# EAGLE board 6274Amp_V2 (EAGLE 7.2.0)
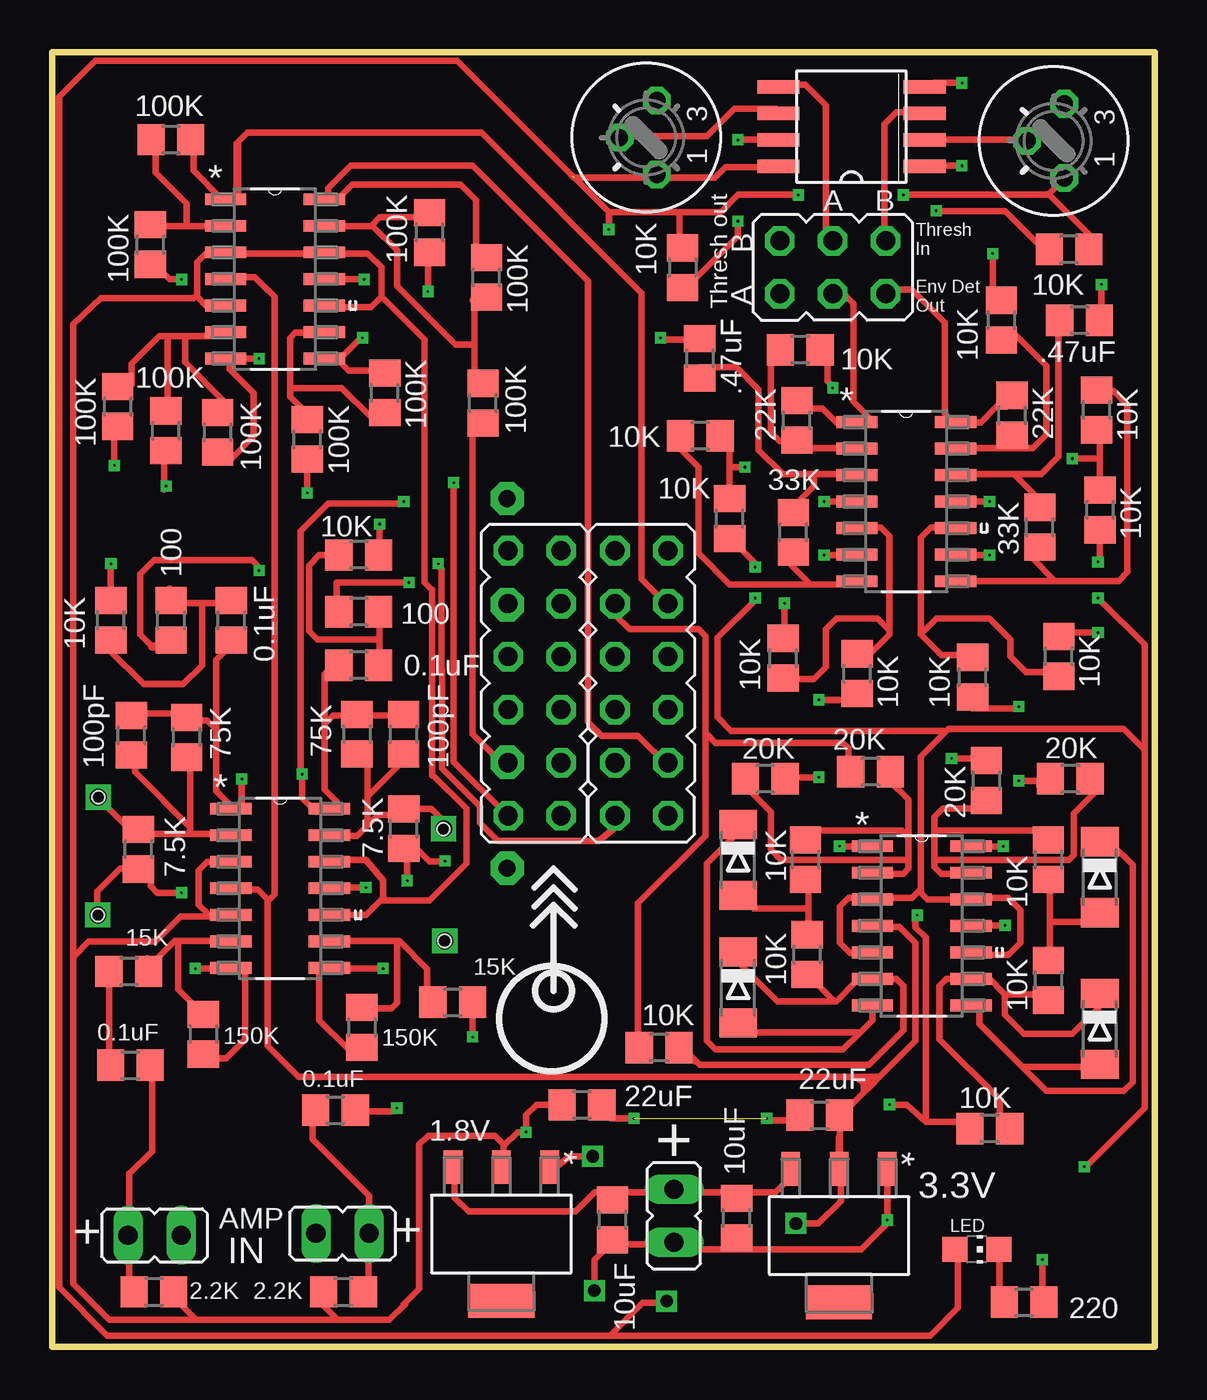
[diagram p0: board, top side]
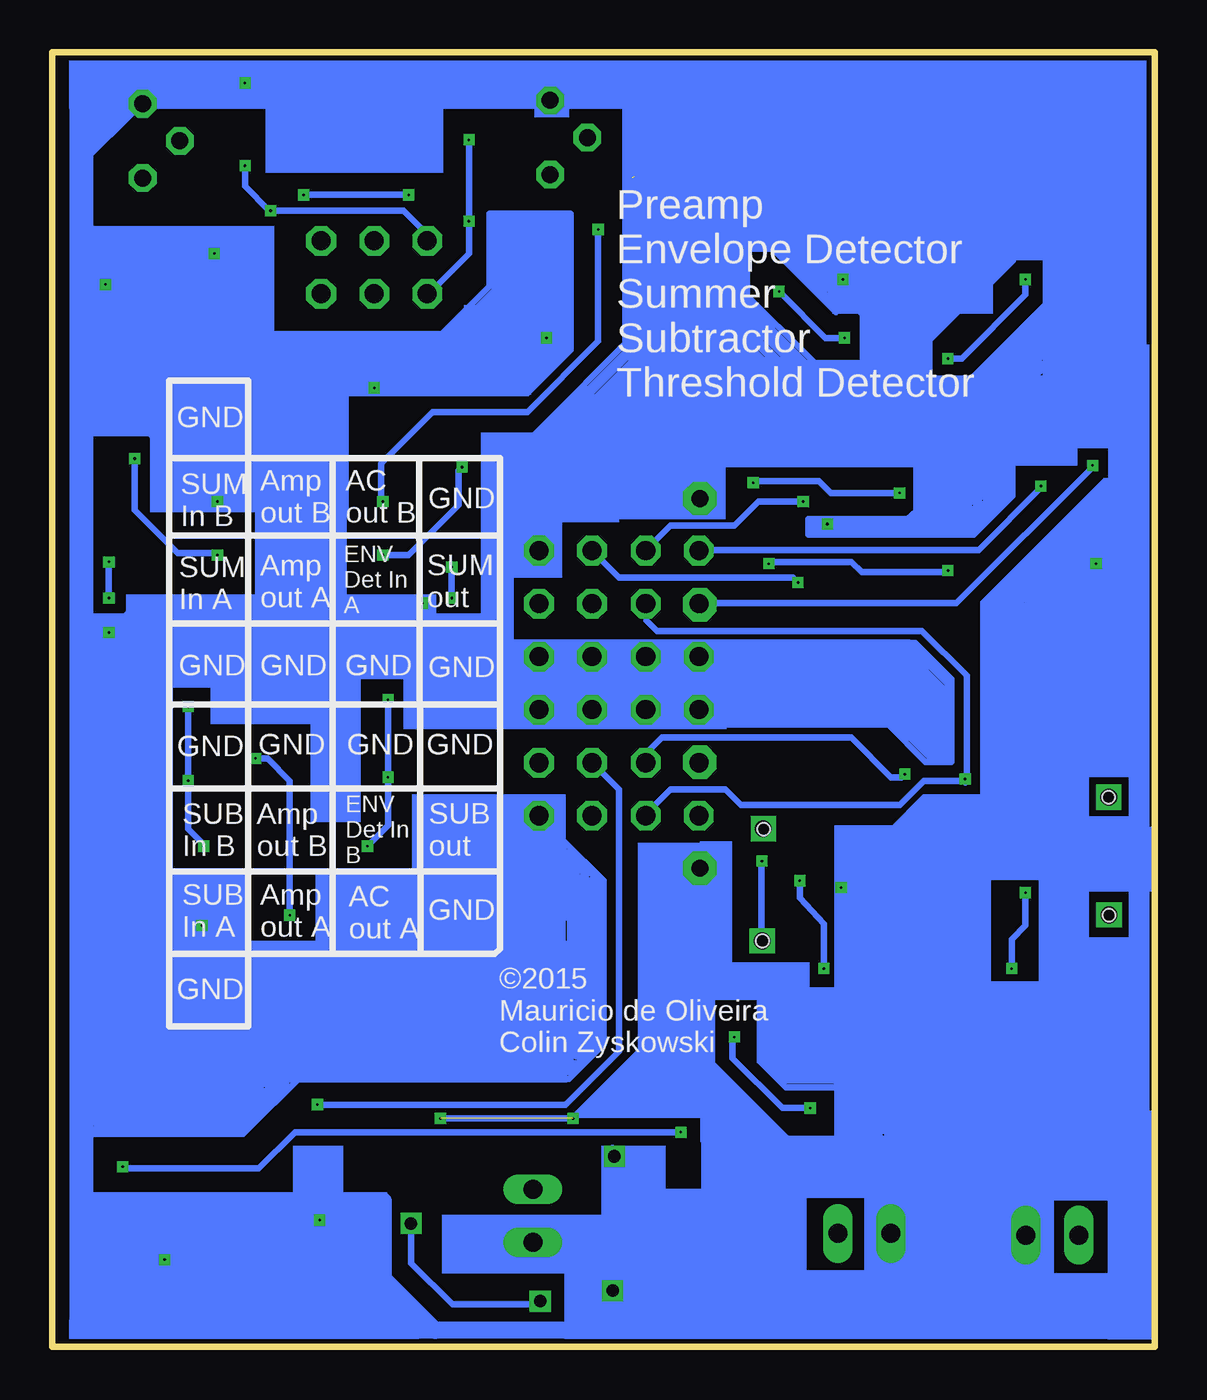
[diagram p1: board, bottom side, seen from below]

Size 52.83 x 62.01 mm. Coordinates in mm from the lower left corner, seen from the top.
Outline: 0,0 0,62.01 52.83,62.01 52.83,0 0,0
Copper layers (1*16): Top 0.035mm / dielectric 1.5mm / Bottom 0.035mm
Design rules "default": minimum track width 10mil, minimum drill 24mil, track to track 8mil, track to pad 8mil, pad to pad 8mil, via to via 8mil, smd to smd 8mil, copper to edge 40mil, drill to drill 8mil, minimum pad ring 10mil, minimum via ring 8mil, stop-mask expansion 4mil, vias tented up to drill 0mil, thermal gap 10mil
Holes 0.6 mm at 2.19,20.66 2.21,26.31 18.75,24.79 18.8,19.43

## Footprints (pad centres in the part's own frame; a part is rotated, then mirrored left to right if it is on the bottom)
R0805 = smd 1.3 x 1.5: 1 -0.95,0; 2 0.95,0
05 = drill 0.813 pad 1.6 octagon: 1 -2.54,0; 2 2.54,0
SO08-208 = smd 0.66 x 2.032: 1 -1.905,-3.498; 2 -0.635,-3.498; 3 0.635,-3.498; 4 1.905,-3.498; 5 1.905,3.498; 6 0.635,3.498; 7 -0.635,3.498; 8 -1.905,3.498
JP6Q = drill 0.914 octagon: 1 -6.35,-1.27; 2 -6.35,1.27; 3 -3.81,-1.27; 4 -3.81,1.27; 5 -1.27,-1.27; 6 -1.27,1.27; 7 1.27,-1.27; 8 1.27,1.27; 9 3.81,-1.27; 10 3.81,1.27; 11 6.35,-1.27; 12 6.35,1.27
RJ6 = drill 0.813 octagon: A -1.778,-0.508; E 1.778,-0.508; S 0,1.27
JP1 = drill 0.914 long: 1 0,-1.27; 2 0,1.27
JP3Q = drill 0.914 octagon: 1 -2.54,-1.27; 2 -2.54,1.27; 3 0,-1.27; 4 0,1.27; 5 2.54,-1.27; 6 2.54,1.27
MINIMELF = smd 1.4 x 1.8: A 1.7,0; C -1.7,0
SOT230P700X180-4N = smd 1.626 x 0.889: 1 -3.2,2.311; 2 -3.2,0; 3 -3.2,-2.311 | smd 1.626 x 3.175: 4 3.2,0
CHIP-LED0805 = smd 1.2 x 1.2: A 0,-1.05; C 0,1.05
SOIC127P600X175-14N = smd 1.981 x 0.559: 1 -2.362,3.81; 2 -2.362,2.54; 3 -2.362,1.27; 4 -2.362,0; 5 -2.362,-1.27; 6 -2.362,-2.54; 7 -2.362,-3.81; 8 2.362,-3.81; 9 2.362,-2.54; 10 2.362,-1.27; 11 2.362,0; 12 2.362,1.27; 13 2.362,2.54; 14 2.362,3.81

## Placement (x,y rotation side)
E$1  [R0805]  26.85,6.07 90 top
E$2  [R0805]  36.77,11.09 0 top
E$3  [R0805]  25.38,11.58 0 top
E$4  [R0805]  30.2,51.69 270 top
E$5  [05]  21.8,38.09 90 top
E$6  [05]  21.8,25.46 90 top
E$7  [R0805]  48.72,52.56 180 top
E$82  [SO08-208]  38.3,58.45 90 top
E$83  [JP6Q]  23.12,31.78 90 top
E$84  [JP6Q]  28.24,31.78 90 top
E$85  [RJ6]  47.99,57.77 90 top
E$86  [JP1]  29.8,6.25 180 top
E$87  [RJ6]  28.46,57.92 90 top
E$88  [JP3Q]  37.4,51.71 0 top
E$89  [R0805]  50.04,44.87 90 top
E$90  [R0805]  50.21,40.08 90 top
E$91  [R0805]  47.32,39.26 90 top
E$92  [R0805]  46,44.62 90 top
E$93  [R0805]  49.22,49.16 180 top
E$94  [R0805]  45.48,49.17 90 top
E$95  [R0805]  48.23,33.06 90 top
E$96  [R0805]  44.1,32.07 90 top
E$97  [R0805]  35.68,44.37 90 top
E$98  [JP1]  4.9,5.33 90 top
E$99  [JP1]  13.91,5.42 90 top
E$100  [R0805]  3.75,13.48 0 top
E$101  [R0805]  3.67,17.98 0 top
E$102  [R0805]  7.25,14.96 270 top
E$103  [R0805]  4.13,23.82 90 top
E$104  [R0805]  3.8,29.28 90 top
E$105  [R0805]  6.45,29.18 90 top
E$106  [R0805]  2.81,34.8 90 top
E$107  [MINIMELF]  50.2,22.49 270 top
E$108  [MINIMELF]  50.2,15.22 270 top
E$109  [R0805]  47.73,23.32 90 top
E$110  [R0805]  47.73,17.55 90 top
E$111  [R0805]  44.93,10.45 180 top
E$112  [R0805]  29.08,14.33 180 top
E$113  [R0805]  12.22,43.47 90 top
E$114  [R0805]  15.94,45.69 90 top
E$115  [R0805]  20.64,45.2 90 top
E$116  [R0805]  20.81,51.23 90 top
E$117  [R0805]  18.08,53.37 90 top
E$118  [R0805]  13.96,2.62 0 top
E$120  [R0805]  4.88,2.62 0 top
E$122  [R0805]  31.06,43.63 180 top
E$123  [R0805]  3.14,45.03 90 top
E$124  [R0805]  5.45,43.88 90 top
E$125  [R0805]  7.93,43.8 90 top
E$126  [R0805]  4.71,52.79 90 top
E$127  [R0805]  5.69,57.82 180 top
E$128  [R0805]  35.85,47.76 180 top
E$129  [SOT230P700X180-4N]  37.7,5.31 270 top
E$130  [SOT230P700X180-4N]  21.52,5.4 270 top
E$131  [R0805]  31.03,47.35 270 top
E$132  [R0805]  35.52,39.01 90 top
E$133  [R0805]  32.46,39.67 90 top
E$134  [MINIMELF]  32.86,17.2 270 top
E$135  [R0805]  36.18,18.78 90 top
E$136  [MINIMELF]  32.86,23.31 270 top
E$137  [R0805]  36.09,23.32 90 top
E$138  [R0805]  32.79,6.15 90 top
E$139  [R0805]  5.7,34.8 90 top
E$140  [R0805]  8.59,34.8 90 top
E$141  [R0805]  14.69,35.2 180 top
E$142  [R0805]  14.69,32.64 180 top
E$143  [R0805]  14.6,29.34 270 top
E$144  [R0805]  16.83,29.34 270 top
E$145  [R0805]  16.85,24.81 90 top
E$146  [R0805]  13.58,11.33 0 top
E$147  [R0805]  14.84,15.29 270 top
E$148  [R0805]  19.19,16.49 0 top
E$149  [R0805]  14.69,37.92 180 top
E$150  [R0805]  38.57,32.24 90 top
E$151  [R0805]  35.02,32.98 90 top
E$152  [R0805]  44.76,27.12 90 top
E$153  [R0805]  48.78,27.2 180 top
E$154  [R0805]  34.17,27.2 180 top
E$155  [R0805]  39.2,27.53 180 top
E$163  [CHIP-LED0805]  44.3,4.65 270 top
E$164  [R0805]  46.56,2.13 0 top
MCP4  [SOIC127P600X175-14N]  40.92,40.48 0 top
MCP5  [SOIC127P600X175-14N]  41.66,20.15 0 top
MCP6  [SOIC127P600X175-14N]  10.92,21.95 0 top
MCP7  [SOIC127P600X175-14N]  10.67,51.14 0 top

## Library data of the parts
E$1-E$4 E$7 E$89-E$97 E$100-E$106 E$109-E$118 E$120 E$122-E$128 E$131-E$133 E$135 E$137-E$155 E$164 = eagle-ltspice
E$5 E$6 = jumper4
E$82 = maxim
E$83 E$84 E$86 E$88 E$98 E$99 = jumper
E$85 E$87 = pot
E$107 E$108 E$134 E$136 = ref-packages
E$129 E$130 = LD1117s_VoltageRegulator
E$163 = ref-packages-longpad
MCP4-MCP7 = MCP3423

## Nets
S$343: MCP4.4

## Tracks (layer width: path | path; a pad name or v marks a point on that pad's centre or on a via)
S$1
  Bottom 0.305: 28.98,47.42 28.98,47 | 28.98,47 28.98,46.75 30.05,45.68 51.27,45.68 51.35,45.6 | 28.98,47 29.06,47 29.97,46.09 29.97,46.75 29.64,47.09
S$2
  Bottom 0.305: 2.9,39.99 2.9,39.9 5.87,36.93 5.87,36.11 4.38,36.11 4.3,36.19 4.3,38.25 5.78,36.77 5.78,36.35 5.7,36.27 4.46,36.27
S$3
  Bottom 0.305: 50.94,57.4 49.04,59.3 50.86,59.3 50.86,57.82 | 50.86,57.73 50.86,57.82 | 50.86,57.82 49.45,59.22 49.7,59.22 50.77,58.15 50.77,58.48 50.11,59.14 50.36,59.14 50.69,58.81 50.69,59.05 50.61,59.14
S$4
  Bottom 0.305: 51.85,59.39 51.85,1.1
S$5
  Bottom 0.305: 21.72,13.82 21.47,13.82 17.34,9.69 21.47,9.69 21.63,9.86 21.63,13.65 17.75,9.77 18.08,9.77 21.47,13.16 21.47,10.02 18.74,10.02 18.66,10.1 18.74,10.1 21.39,12.74 21.39,12.41 19.16,10.19 19.49,10.19 21.3,12 21.3,11.67 19.74,10.1 20.07,10.1 21.39,11.42 21.39,11.18 20.4,10.19 20.73,10.19 21.3,10.76 21.3,10.43 21.06,10.19 21.3,10.19 21.39,10.27
S$6
  Bottom 0.305: 24.61,14.4 24.61,14.23 27.74,11.09 25.02,11.09 | 25.02,11.09 24.61,11.09 | 24.61,11.09 24.61,13.57 24.77,13.74 27.25,11.26 24.85,11.26 24.85,13.4 26.92,11.34 26.5,11.34 24.94,12.91 24.94,12.58 26.09,11.42 25.76,11.42 25.02,12.17 25.02,11.84 25.43,11.42 25.18,11.42 25.02,11.59 25.02,11.09 | 24.61,11.09 21.14,11.09 20.97,11.26
S$7
  Bottom 0.305: 28.73,12.83 28.07,12.83 26.42,14.48 26.42,14.56 | 26.42,14.56 26.42,22.32 28.32,24.22 28.32,22.32 26.67,22.32 | 26.67,22.32 26.59,22.24 | 26.67,22.32 28.07,23.72 28.07,22.49 27.33,22.49 27.25,22.57 27.91,23.23 27.91,22.82 27.83,22.73 27.66,22.73 | 26.42,14.56 28.16,14.56 28.16,13.16 28.07,13.16 27.66,13.57 | 26.92,14.31 27.08,14.15 27.25,13.98 | 26.92,14.31 27.99,14.31 27.99,13.57 27.66,13.57 | 27.66,13.57 27.25,13.98 | 26.92,14.31 26.83,14.4 27.25,14.4 27.74,13.9 27.74,14.07 27.58,14.23 27.33,13.98 27.25,13.98
S$8  (via drill 0.13)
  Top 0.305: v2.81,37.51 2.81,35.69
  Bottom 0.305: 2.73,40.32 2.81,40.23 v2.81,37.51
S$9
  Bottom 0.305: 6.86,41.14 6.86,40.73 8.67,38.91 16.6,38.91 16.6,39.66 11.81,39.66 11.73,39.74 | 11.32,40.15 11.32,41.06 | 11.32,39.9 11.32,39.16 8.76,39.16 7.19,40.73 7.6,40.73 | 7.85,40.73 11.07,40.73 11.15,40.65 11.15,39.33 9,39.33 7.6,40.73 | 7.6,40.73 7.85,40.73 | 7.85,40.73 9.17,39.41 10.74,39.41 10.9,39.57 10.9,40.48 8.51,40.48 8.43,40.56 8.43,40.4 9.25,39.57 10.66,39.57 10.74,39.66 10.74,40.23 9,40.23 | 9,40.23 8.92,40.32 | 9,40.23 9.33,39.9 10.57,39.9 10.49,39.99 9.66,39.99 9.5,40.15 10.9,40.15 11.65,39.41 11.65,39.24 16.35,39.24 16.43,39.16 16.43,39.41 11.98,39.41 11.89,39.49 11.56,39.16 | 11.73,39.57 11.73,39.74 | 11.73,39.74 11.32,40.15 | 11.32,40.15 11.32,39.9 | 11.32,39.9 11.48,39.9
S$10
  Bottom 0.305: 29.15,46.67 29.06,46.67 27.99,47.75 27.99,54.27 31.87,54.27 31.87,50.8 34.26,48.41 33.85,48.41 31.62,50.63 31.62,50.22 33.69,48.16 33.44,48.16 31.62,49.97
S$11
  Bottom 0.305: 28.73,48.98 28.73,47.33 | 28.73,47.33 28.82,47.25 | 28.73,47.33 28.24,47.83 28.24,48.98 28.57,48.98 28.57,47.83 28.49,47.75 28.49,48.74 28.4,48.82
S$12
  Bottom 0.305: 24.69,49.4 24.69,48.74 29.89,43.54 29.48,43.54 24.69,48.32 24.69,47.99 29.23,43.45 28.82,43.45 24.36,47.91 24.36,47.5 28.57,43.29 28.16,43.29 24.36,47.09 24.36,46.75 27.91,43.21 27.5,43.21 24.52,46.18 24.52,45.85 26.75,43.62 26.42,43.62 24.61,45.43 24.61,45.02 25.93,43.7 25.6,43.7 24.69,44.61 24.69,44.28 25.35,43.62 25.1,43.62 24.77,43.95
S$13
  Bottom 0.305: 15.53,47.09 16.27,47.09 19.9,50.72 19.9,50.3 16.76,47.17 17.18,47.17 19.65,49.64 19.65,49.31 17.59,47.25 18,47.25 19.57,48.82 19.57,48.49 18.33,47.25 18.74,47.25 19.57,48.08 19.57,47.75 19.08,47.25 19.32,47.25 19.41,47.33
S$14  (via drill 0.13)
  Bottom 0.305: v14.87,48.32 15.77,48.32 17.92,50.47
S$15
  Top 0.305: 34.26,10.85 35.59,10.85
S$16
  Bottom 0.305: 34.26,10.93 27.83,10.93 27.58,11.18
S$17
  Top 0.305: 27.83,10.93 26.75,10.93 26.34,11.34
S$18
  Bottom 0.305: 21.63,42.3 23.04,42.3 24.52,40.81 24.94,40.81 | 25.84,40.81 24.94,40.81 | 24.94,40.81 23.29,42.46 23.7,42.46 24.69,41.47 24.69,41.88 24.11,42.46
S$19
  Bottom 0.305: 38.31,1.19 35.59,1.19 35.59,1.1 38.14,1.1
S$20  (via drill 0.13)
  Bottom 0.305: v16.85,40.48 18.99,40.48 20.15,39.33 23.2,39.33 24.44,38.09
S$21
  Bottom 0.305: 18.91,13.82 18.91,13.65 17.67,12.41 15.03,12.41 | 14.95,12.41 15.03,12.41 | 15.03,12.41 15.36,12.74 17.84,12.74 18.66,13.57 15.36,13.57 15.36,12.91 15.44,12.83 17.59,12.83 18.17,13.4 15.53,13.4 15.44,13.32 15.44,13.24 17.75,13.24 17.51,12.99 15.36,12.99 15.11,13.24
S$22
  Bottom 0.305: 12.8,30.08 12.8,29.83 10.99,28.02 9.75,28.02 9.75,31.98 11.48,33.71 12.14,33.71 12.39,33.46 11.65,33.46 9.91,31.73 9.91,28.18 10.74,28.18 12.31,29.75 11.98,29.75 10.66,28.43 10.08,28.43 10.08,31.48 11.81,33.22 11.81,29.91 11.73,29.91 10.49,28.68 10.32,28.68 10.32,31.32 11.65,32.64 11.65,29.91 10.66,28.92 10.66,31.9 11.56,32.8 11.56,30.08 11.07,29.58 | 11.07,29.58 10.49,29.01 10.49,31.32 10.66,31.32 11.4,32.06 11.4,30.16 10.74,29.5 10.74,31.07 10.82,31.15 10.82,31.32 11.15,31.65 11.15,30.25 10.99,30.08 10.99,31.15 10.9,31.24 10.9,29.75 11.07,29.58
S$23
  Bottom 0.305: 5.04,50.14 9.25,45.93 8.84,45.93 5.04,49.73 5.04,49.31 8.18,46.18 7.77,46.18 5.21,48.74 5.21,48.41 7.19,46.42 6.78,46.42 5.29,47.91 5.29,47.58 6.78,46.09 6.45,46.09 5.45,47.09 5.45,46.75 5.87,46.34 5.87,46.42 5.7,46.59
S$24
  Bottom 0.305: 15.28,49.56 18.08,52.37 15.53,52.37 15.53,50.14 | 15.53,49.97 15.53,50.14 | 15.53,50.14 17.59,52.2 15.86,52.2 15.77,52.12 15.77,50.72 | 15.77,50.63 15.77,50.72 | 15.77,50.72 17.09,52.04 16.02,52.04 15.94,51.96 15.94,51.13 16.68,51.87 16.19,51.87 16.19,51.63 | 16.19,51.46 16.19,51.63 | 16.19,51.63 16.35,51.79
S$26
  Bottom 0.305: 40.79,13.07 43.68,10.19 51.02,10.19 | 51.1,10.19 51.02,10.19 | 51.02,10.19 50.77,10.43 43.76,10.43 41.61,12.58 43.43,12.58 43.43,11.09 42.02,12.5 42.35,12.5 43.26,11.59 43.26,12.41 42.85,12.41 42.85,12.33 43.1,12.08 44.58,12.08 44.83,11.84
S$27
  Top 0.305: 7.19,35.53 7.19,32.64 6.28,31.73 4.38,31.73 2.73,33.38
S$28
  Top 0.406: 5.62,35.61 5.62,36.27
S$29
  Top 0.305: 4.79,33.55 4.22,34.12 4.22,37.01 4.88,37.67 7.93,37.67 | 7.02,37.67 7.93,37.67 | 7.93,37.67 9.58,37.67 9.99,37.26
  Top 0.406: 5.62,33.55 4.79,33.55
S$30
  Bottom 0.305: 3.23,39.08 3.06,39.08 2.98,39.16 2.98,39.49 5.12,37.34 5.12,36.77 4.88,37.01 4.88,36.68 5.29,36.68 4.63,37.34 4.63,36.6 4.79,36.44 5.62,36.44 5.54,36.52 5.54,36.68 4.46,37.76
S$31  (via drill 0.8)
  other vias: 18.76,24.81
S$32  (via drill 0.8)
  other vias: 2.21,26.32
S$33
  Top 0.305: 4.01,24.87 3.61,24.87 2.21,26.27
S$34
  Top 0.305: 4.16,22.9 3.26,22.9 2.16,21.8 2.16,20.5
S$35
  Top 0.305: 27,25.46 27,24.88 26.17,24.23 21.36,24.23
S$36
  Top 0.305: 20.5,25.09 20.5,25.88 18.68,27.7 18.68,28.21 18.67,28.22
S$37
  Top 0.305: 21.36,24.23 20.51,25.08
S$38
  Top 0.305: 13.79,23.31 15.03,23.31 15.86,22.32 15.86,21.49 15.03,20.67 13.79,20.67
S$39
  Top 0.305: 18.2,36.26 18.2,27.36
S$40
  Top 0.305: 15.79,21.37 18.08,21.37 19.85,23.14 19.85,25.78 18.26,27.36
S$41
  Top 0.305: 18.75,24.79 18.75,25.18 18.18,25.75 16.8,25.75 16.78,25.77
S$42
  Top 0.305: 18.8,23.25 18.08,23.25 17.46,23.87 16.99,23.87
S$43
  Bottom 0.305: 18.86,23.3 18.86,19.5
S$44
  Bottom 0.305: 6.81,52.21 6.81,52.03 8.22,50.62 8.22,50.98 7.16,52.03 7.34,52.03 7.69,51.68 7.69,52.03 7.51,52.03
S$45
  Bottom 0.305: 9.45,49.74 9.45,49.57 11.04,47.98 11.04,48.33 9.8,49.57 10.15,49.57 10.68,49.04 10.68,49.21 10.51,49.39 10.68,49.39
S$46
  Bottom 0.305: 5.4,37.58 5.4,37.41 8.04,34.77 8.04,34.41 | 8.04,34.06 8.04,34.41 | 8.04,34.41 6.1,36.35 6.1,36 7.86,34.24 7.51,34.24 6.28,35.47 6.28,35.12 6.98,34.41 6.63,34.41 6.1,34.94 6.1,34.77 6.45,34.41
S$47
  Bottom 0.305: 2.05,41.46 2.23,41.46 | 2.23,41.46 2.4,41.46 8.22,35.65 8.22,25.96 | 2.23,41.46 2.23,41.28 8.04,35.47 8.04,35.12 6.1,37.06
S$48
  Top 0.305: 7.86,20.6 6.16,20.6 4.96,19.4 1.76,19.4 1.06,18.7
S$49
  Top 0.305: 17.96,16.4 17.96,18.1 16.66,19.4 16.56,19.4
S$50
  Bottom 0.305: 13.06,24.8 12.56,24.8 11.06,26.3 11.06,26 12.26,24.8 11.96,24.8 11.06,25.7 11.06,25.4 11.56,24.9 11.36,24.9 11.06,25.2 11.06,24.8 11.46,24.4
S$51
  Top 0.305: 30.76,56 31.76,56 32.26,56.5 34.76,56.5
S$52
  Top 0.305: 32.86,53.9 32.86,53.2 30.06,50.4
S$53
  Top 0.305: 30.06,54.3 30.06,52.7
S$54
  Top 0.305: 42.36,54.4 45.66,54.4 47.76,52.3
S$55
  Top 0.305: 47.66,55.2 47.76,55.2 49.76,53.2 49.76,52.6 49.66,52.5
S$56  (via drill 0.8)
  other vias: 2.19,20.68
S$57  (via drill 0.8)
  other vias: 18.81,19.43
S$58  (via drill 0.13)
  Top 0.305: 16.93,23.64 17.01,23.56 v17.01,22.32
S$59  (via drill 0.13)
  other vias: 40.01,6.06
S$84  (via drill 0.13)
  other vias: 50.11,37.59
S$169
  Top 0.305: 37.73,19.43 37.73,21.08 38.14,21.49 39.05,21.49
S$170
  Top 0.305: 39.71,50.63 41.2,50.63 42.77,49.07 42.77,44.69 43.26,44.2
S$171  (via drill 0.13)
  Top 0.305: 12.64,25.62 11.98,26.28 v11.98,27.43 11.89,27.36 11.89,39.08 13.21,40.4 16.85,40.4
  Bottom 0.305: 24.36,28.43 23.62,29.17 14.53,29.17 12.64,27.27 12.14,27.27 v11.98,27.43
S$172  (via drill 0.13)
  Top 0.305: v43.59,56.58 42.35,56.58
S$173
  Bottom 0.305: 24.36,34.79 23.86,34.29 11.15,34.29 9,32.14 9,27.11 9.09,27.03
S$174
  Bottom 0.305: 43.59,56.5 43.59,55.59 42.44,54.43 36,54.43 34.84,53.28 34.84,53.03
S$175  (via drill 0.13)
  Top 0.305: v15.03,21.99 13.54,21.99
  Bottom 0.305: v15.03,21.99 15.03,21.91 | 15.03,9.77 15.03,21.91 | 15.03,21.91 10.41,21.91 6.03,26.28 6.03,37.1 1.74,41.39 | 1.74,41.39 1.74,43.78 2.73,44.77 9.33,44.77 14.95,50.39 14.95,51.05 | 1.74,41.39 1.74,38.83 2.32,38.83 2.65,39.16 2.65,40.32 1.9,41.06 1.9,39 2.32,39 2.48,39.16 2.48,40.15 2.4,40.23 2.4,40.32 2.07,40.65 2.07,39.24 2.15,39.16 2.24,39.16 2.32,39.24 2.32,40.23
S$176
  Top 0.305: 21.44,8.78 21.44,9.19
S$177
  Bottom 0.305: 9.09,27.11 11.07,27.11 12.22,25.95 19.82,25.95 20.56,26.7 23.2,26.7 24.52,25.37
S$178
  Top 0.305: 37.15,50.63 37.73,50.63 38.39,49.97 38.39,45.27 39.38,44.28
S$179  (via drill 0.13)
  Top 0.305: v14.95,51.13 13.71,51.13
S$180  (via drill 0.13)
  Top 0.305: v43.1,28.18 44.75,28.18
  Bottom 0.305: v41.45,20.67 41.45,27.11 42.52,28.18 v43.1,28.18
S$182  (via drill 0.13)
  other vias: 43.59,60.54
S$183
  Top 0.305: 39.63,53.11 39.88,53.36 39.88,58.56 40.46,59.14 41.45,59.14
S$184
  Top 0.305: 35.25,60.46 36.08,60.46 37.07,59.47 37.07,53.44 37.15,53.36
S$185
  Top 0.305: 43.68,60.54 42.27,60.54
S$186
  Top 0.305: 42.02,57.82 46.81,57.82
S$187
  Top 0.305: 27.08,57.98 31.38,57.98 32.7,59.3 34.68,59.3 34.76,59.22
S$188
  Top 0.305: 4.63,13.4 4.79,13.24 4.79,11.67 4.79,11.26 4.79,11.09 4.79,10.35 4.79,9.36 3.72,8.29
S$189
  Top 0.305: 43.76,41.8 46.07,41.8 | 46.07,41.8 47.39,41.8 48.22,42.63 48.22,49.15 | 46.07,41.8 47.06,40.81 47.06,39.9 47.14,39.82
S$190
  Top 0.305: 50.2,43.87 50.2,41.22
S$191
  Top 0.305: 44.01,43.04 46.98,43.04 47.64,43.7 47.64,47 45.99,48.65 45.16,48.65
S$192
  Top 0.305: 43.92,44.28 44.5,44.28 45.24,45.02 45.74,45.02
S$193
  Top 0.305: 37.98,43.04 36.16,43.04
S$194
  Top 0.305: 37.9,44.28 37.57,44.28 36.91,44.94 36.08,44.94
S$195
  Top 0.305: 16.9,2.01 16.15,1.27 6.91,1.27 | 6.91,1.27 5.75,2.43 | 6.91,1.27 2.73,1.27 1,3 1,48.98 2.32,50.22 6.78,50.22 6.94,50.39 | 13.46,49.81 15.28,49.81 15.77,50.3 | 15.77,50.3 15.77,51.71 15.11,52.37 7.35,52.37 6.94,51.96 6.94,50.39 | 8.34,49.73 8.43,49.81 7.44,49.81 6.94,50.3 6.94,50.39 | 15.77,50.3 17.84,48.24 17.84,36.6 18.17,36.27
S$196
  Top 0.305: 29.53,2.1 28.29,2.1 26.72,0.53 | 26.72,0.53 2.7,0.53 | 26.72,0.53 42.07,0.53 43.4,1.85 43.4,4.49
S$197  (via drill 0.13)  (1 unrouted)
  Top 0.305: v35.75,55.18 32.86,55.18 32.04,54.35 26.67,54.35 | 25.02,56 30.85,56 | 2.65,0.53 0.34,2.84 0.34,59.88 2.07,61.61 19.41,61.61 24.94,56.08 25.02,56 | 26.67,54.35 25.02,56 | v40.79,55.18 47.72,55.18 48.55,56 | v26.67,53.52 26.67,54.35
  Bottom 0.305: v40.79,55.18 v35.75,55.18
S$198
  Top 0.305: 39.95,20.1 40.59,20.1 41.3,19.39
S$199
  Top 0.305: 39.22,44.44 38.97,44.2
S$200
  Top 0.305: 50.11,13.32 50.28,13.49
S$202
  Top 0.305: 47.8,18.94 47.8,20.34 | 47.8,20.34 47.8,21.82 47.89,21.91 | 47.8,20.34 50.11,20.34 50.36,20.59
S$203
  Top 0.305: 2.73,13.49 2.73,17.7 2.65,17.78
S$205
  Top 0.305: 9.09,23.23 7.44,23.23 7.02,22.82 7.02,21.16 7.52,20.67 8.67,20.67
S$206
  Top 0.305: 9.25,18.03 9.25,14.73 8.34,13.82 7.6,13.82
S$207
  Top 0.305: 8.26,19.43 5.87,19.43 4.38,17.95
S$208
  Top 0.305: 4.55,18.61 4.46,18.52
S$209  (via drill 0.13)
  Top 0.305: v6.2,21.74 5.04,21.74 4.71,22.07 4.71,22.82 | v6.86,18.11 8.59,18.11
  Bottom 0.305: v6.86,18.11 6.86,19.51 6.2,20.17 v6.2,21.74
S$210
  Top 0.305: 8.18,24.55 4.3,24.55
S$211
  Top 0.305: 6.03,19.43 6.03,17.12 7.02,16.13
S$212
  Top 0.305: 50.28,45.76 50.86,45.76 51.52,45.1 51.52,37.1 51.1,36.68 48.05,36.68 | 48.05,36.68 43.68,36.68 | 46.98,38.17 46.98,37.76 48.05,36.68
S$213  (via drill 0.13)
  Top 0.305: 16.85,2.01 17.59,2.76 17.59,9.69 18,10.1 21.22,10.1 21.63,9.69 21.63,9.61 | 21.63,9.61 21.63,8.37 | 21.63,9.61 22.29,10.27 v22.71,10.27 22.71,11.09 23.2,11.59 24.44,11.59
  Bottom 0.305: v22.71,10.27 41.2,10.27 42.93,8.53 49.37,8.53 v49.45,8.62
S$214
  Bottom 0.305: 32.86,57.73 32.86,52.37 34.92,50.3
S$215
  Top 0.305: 41.36,20.59 41.36,20.09 41.86,19.6 41.86,10.85
S$216
  Top 0.305: 43.84,17.61 42.85,17.61 42.52,17.28 42.52,14.73 45.41,11.84 45.41,11.01 45.57,10.85
S$217
  Top 0.305: 43.01,39.24 42.11,39.24 41.61,38.75 41.61,34.12 42.6,33.13 44.34,33.13
S$218  (via drill 0.13)
  Top 0.305: v32.86,57.82 34.35,57.82 34.43,57.73
  other vias: 32.86,53.92 42.36,54.42
S$219  (via drill 0.13)
  Top 0.305: 13.63,34.95 13.63,36.6 v17.09,36.6
  Bottom 0.305: 26.92,38.17 26.92,38.09 25.68,36.85 17.34,36.85 v17.09,36.6
S$220
  Top 0.305: 33.6,21.25 33.36,21.49
S$221
  Top 0.305: 36.25,22.65 36.25,21 | 36.25,21 36.25,19.93 | 36.25,21 33.6,21 32.94,21.66
S$222
  Top 0.305: 33.11,18.77 33.11,18.19 34.76,16.54 37.48,16.54 | 39.13,17.45 39.05,17.53 38.56,17.53 37.57,16.54 37.48,16.54 | 37.48,16.54 36.41,17.61
S$223
  Top 0.305: 47.64,32.31 46.65,32.31 45.9,33.05 45.9,33.88 44.91,34.87 42.35,34.87 41.69,34.21
S$224
  Top 0.305: 3.69,3.99 3.69,2.43 3.61,2.34
S$225
  Top 0.305: 12.93,2.34 12.85,2.26
S$226  (via drill 0.13)
  other vias: 50.11,35.86
S$227
  Top 0.305: 50.2,37.59 50.2,39.08
S$228
  Bottom 0.305: 50.11,37.51 50.11,35.94
S$229  (via drill 0.13)
  Top 0.305: v44.91,37.92 43.76,37.92
S$230  (via drill 0.13)
  Top 0.305: v48.88,42.54 50.11,42.54
  Bottom 0.305: v48.88,42.54 48.88,40.07 46.81,38 45.08,38 45,37.92
S$231
  Top 0.305: 47.8,18.85 47.72,18.77
S$232
  Top 0.305: 37.7,10.05 37.7,7.99
S$233  (via drill 0.13)
  Top 0.305: v9.09,27.19 9.09,25.79
S$234
  Top 0.305: 13.63,24.47 14.62,24.47 15.11,24.96 | 15.11,24.96 15.61,25.46 17.01,25.46 | 15.11,24.96 15.11,26.37 | 15.11,26.37 15.11,28.18 | 16.76,28.02 15.11,26.37
S$235
  Top 0.305: 32.7,24.63 32.7,24.47 31.38,23.15 31.38,14.64 31.79,14.23 37.9,14.23 38.72,15.06 | 39.3,16.38 39.3,15.63 38.72,15.06 | 38.72,15.06 33.11,15.06 32.86,15.3
S$236
  Top 0.305: 44.34,25.79 42.68,25.79 42.27,25.37 42.27,24.71 | 43.68,22.57 43.59,22.65 42.6,22.65 42.27,22.98 42.27,23.31 | 42.27,24.71 42.27,23.31 | 42.27,24.71 47.14,24.71 47.72,24.14 | 42.27,23.31 48.71,23.31 48.96,23.56 48.96,25.54 50.03,26.61 50.03,27.19
S$237
  Top 0.305: 3.8,46.09 3.8,47.09 5.12,48.41 6.36,48.41 | 6.36,48.41 8.01,48.41 8.18,48.57 | 6.36,48.41 6.36,47.17 8.18,45.35
S$238
  Top 0.305: 5.54,48.32 5.54,44.77
S$239
  Top 0.305: 29.03,7.38 34.65,7.38 35.39,8.12
S$240
  Top 0.305: 29.36,7.38 25.98,7.38 25.07,6.47 19.95,6.47 19.29,7.13 19.29,8.29 19.37,8.37
S$241
  Top 0.305: 8.51,47.25 8.51,46.84 9.66,45.68 9.66,43.62 8.59,42.54 8.01,42.54 7.93,42.46
S$242
  Top 0.305: 37.86,8.53 37.86,9.11
S$243
  Top 0.305: 10.32,50.61 9.69,51.24 9.21,51.24 9.05,51.09
S$244  (via drill 0.6)
  Top 0.305: v25.9,9.11 24.82,9.11 23.91,8.45
S$245
  Bottom 0.305: 6.17,5.31 7.82,5.31
S$246
  Bottom 0.305: 10.95,5.4 12.69,5.4
S$247  (via drill 0.6)
  Bottom 0.305: 25.98,9.52 v25.98,2.67 25.98,3.5
S$248
  Top 0.305: 28.12,4.9 28.04,4.9 | 28.04,4.9 26.72,4.9 25.98,4.16 25.98,2.76 | 29.44,4.9 28.04,4.9
S$249
  Top 0.305: 15.08,2.34 15,2.43
S$250
  Top 0.305: 10.24,50.72 10.66,50.3 10.66,21.66 10.32,21.33 | 37.26,12.91 11.81,12.91 10.32,14.4 10.32,21.33 | 8.74,21.89 9.85,21.89 10.32,21.42 10.32,21.33
S$251  (via drill 0.13)
  Top 0.305: v9.91,47.33 8.92,47.33
  Bottom 0.305: v9.91,47.33 9.25,47.33 6.2,50.39 6.2,51.05
S$252  (via drill 0.6)
  other vias: 35.64,5.89
S$253  (via drill 0.6)
  other vias: 29.44,2.18
S$254
  Top 0.305: 37.78,8.12 37.78,6.97 36.71,5.89 35.8,5.89 35.72,5.81
S$255
  Bottom 0.305: 35.64,5.81 35.64,3.99 33.65,2.01 29.53,2.01 29.36,2.18
S$256
  Top 0.305: 3.69,6.31 3.69,8.29
S$258  (via drill 0.13)
  Top 0.305: v6.2,51.13 5.62,51.13 5.21,51.54
S$259
  Top 0.305: 4.96,53.69 6.45,53.69 | 6.45,53.69 7.93,53.69 | 6.45,53.69 6.45,54.76 4.96,56.25 4.96,57.49
S$260
  Top 0.305: 6.78,57.49 6.78,56.33 8.18,54.93
S$261
  Top 0.305: 8.92,55.01 8.92,57.65
S$263
  Top 0.305: 15.69,32.8 15.69,33.88 | 15.69,33.88 15.69,34.79 15.61,34.87 | 15.69,33.88 12.72,33.88 12.31,34.29 12.31,37.43 12.8,37.92 13.87,37.92
S$264
  Top 0.305: 15.16,5.4 15.16,2.76
S$265
  Top 0.305: 12.69,2.26 13.6,1.35
S$266  (via drill 0.13)
  other vias: 5.45,41.22
S$267
  Bottom 0.305: 29.56,27.69 29.81,27.69
S$268  (via drill 0.13)
  other vias: 2.98,42.21
S$269
  Bottom 0.305: 21.88,38.17 8.43,38.17 5.45,41.14
S$270
  Bottom 0.305: 21.88,35.61 9.5,35.61 2.9,42.21
S$271
  Top 0.305: 2.98,42.13 2.98,44.11
S$272
  Top 0.305: 5.37,41.06 5.37,42.96
S$273
  Top 0.305: 29.56,35.53 29.48,35.53 28.24,36.77 28.24,50.47 20.56,58.15 9.33,58.15 8.84,57.65 8.84,55.01
S$274
  Top 0.305: 21.88,27.93 21.55,27.93 20.15,29.34 20.15,43.87
S$275
  Top 0.305: 47.31,26.86 47.64,27.19
S$276
  Top 0.305: 12.64,48.57 11.65,48.57 11.4,48.32 11.4,45.93 | 11.4,45.93 11.4,45.52 12.14,44.77 | 11.4,45.93 13.87,45.93 15.28,44.53 15.86,44.53
S$277
  Top 0.305: 15.94,46.75 14.2,46.75 13.63,47.33
S$278  (via drill 0.13)
  Top 0.305: v18,50.55 18,52.12
S$279
  Top 0.305: 13.79,47.42 13.87,47.42 14.78,48.32
S$280  (via drill 0.13)
  Top 0.305: v12.22,40.89 12.22,42.05
S$281  (via drill 0.13)
  Top 0.305: 21.8,25.46 19.24,28.02 v19.24,41.39
  Bottom 0.305: 12.31,40.89 15.53,40.89 16.1,41.47 19.16,41.47 v19.24,41.39
S$282  (via drill 0.13)
  Top 0.305: v50.28,50.88 50.28,49.07
S$283
  Top 0.305: 18.08,54.1 15.69,54.1 15.28,53.69 13.46,53.69
S$284
  Top 0.305: 20.23,46.34 20.23,47.99 | 20.23,47.99 20.23,50.06 20.15,50.14 | 20.23,47.99 19.32,47.99 16.52,50.8 16.52,52.53 15.36,53.69
S$285
  Top 0.305: 20.31,52.29 20.31,54.93 19.57,55.67 14.37,55.67 13.63,54.93
S$286
  Top 0.305: 13.21,55.01 13.21,55.51 14.29,56.58 20.15,56.58 25.68,51.05 25.68,29.91 26.34,29.25 28.07,29.25 29.48,27.85
S$287
  Bottom 0.305: 16.73,3 9.55,3
S$288
  Top 0.305: 38.14,27.77 38.14,28.68 37.9,28.92 31.79,28.92 31.29,29.42 | 27,35.69 27,35.03 27.66,34.37 30.96,34.37 31.29,34.04 31.29,29.42 | 31.29,29.42 31.29,24.47 28.07,21.25 28.07,14.15
S$289
  Top 0.305: 44.67,21.49 45.82,21.49 46.4,20.92 46.4,19.35 45.82,18.77 44.09,18.77
S$290
  Top 0.305: 50.77,24.05 51.77,23.06 51.77,12.66 51.35,12.25 47.64,12.25 46.48,13.4 | 44.42,16.38 44.42,15.47 46.48,13.4 | 46.48,13.4 50.03,13.4 50.11,13.49
S$291
  Top 0.305: 34.76,48.08 34.84,47.99
S$292
  Top 0.305: 29.15,48.24 30.88,48.24
S$293
  Top 0.305: 45.07,52.45 45.07,50.14
S$294
  Top 0.305: 37.15,47.25 37.15,46.26 37.48,45.93
S$295
  Top 0.305: 35.42,43.37 34.84,43.37 34.43,43.78 34.43,47.33 34.84,47.75
S$296
  Top 0.305: 38.14,41.8 36.49,41.8 | 36.49,41.8 35.01,41.8 33.85,42.96 33.85,45.85 32.78,46.92 31.04,46.92 | 36.49,41.8 36.49,41.22 35.42,40.15
S$297
  Top 0.305: 32.45,43.21 32.45,42.13 | 32.45,42.13 32.45,40.89 32.37,40.81 | 33.27,42.13 32.45,42.13
S$298  (via drill 0.13)
  Top 0.305: v36.99,37.92 38.39,37.92
  Bottom 0.305: v36.99,37.92 35.75,37.92 33.36,40.32 33.36,41.97 v33.19,42.13
S$299
  Top 0.305: 37.73,19.43 37.73,19.35 38.23,18.85 39.38,18.85
S$300
  Top 0.305: 39.8,17.61 40.46,17.61 40.79,17.28 40.79,15.14 39.13,13.49 31.04,13.49 30.88,13.65 | 30.88,13.65 30.47,14.07 | 30.88,13.65 30.8,13.65 30.05,14.4
S$301
  Top 0.305: 35.42,37.76 35.42,37.43 36.33,36.52 | 37.9,36.52 36.33,36.52 | 36.33,36.52 32.45,36.52 30.96,38 30.96,42.13 29.72,43.37
S$302  (via drill 0.13)
  Top 0.305: v33.69,37.34 33.69,37.51 32.78,38.42
  Bottom 0.305: v33.69,37.34 v33.69,35.86
S$303
  Top 0.305: 37.73,19.35 37.81,19.27
S$304
  Top 0.305: 39.63,12.91 38.89,12.91 | 38.89,12.91 36.82,12.91 | 39.63,12.91 41.36,14.64 41.36,19.35 41.2,19.51 | 38.89,12.17 37.73,11.01 37.73,8.86 | 39.22,12.5 39.63,12.91 | 38.89,12.91 39.22,12.58 39.22,12.5 | 39.22,12.5 38.89,12.17 | 38.89,12.17 38.89,12.58 38.64,12.83
S$305
  Top 0.305: 33.69,35.78 31.87,33.96 31.87,30.16 32.53,29.5 42.85,29.5 | 43.76,21.41 41.94,21.41 41.61,21.74 41.61,28.26 42.85,29.5 | 52.26,28.68 51.35,29.58 42.93,29.58 42.85,29.5
S$306
  Top 0.305: 40.13,21.49 41.2,21.49 41.53,21.82
S$307
  Top 0.305: 33.36,24.8 33.03,24.8
S$308  (via drill 0.13)
  Top 0.305: v36.74,27.27 35.5,27.27
S$309
  Top 0.305: 4.13,30.33 6.28,30.33 6.36,30.41
S$310
  Top 0.305: 6.61,24.63 6.61,24.88 | 6.61,24.88 3.97,27.52 3.97,28.1 | 6.61,24.88 6.61,28.26
S$311
  Top 0.305: 6.86,30 7.44,30 7.85,29.58 | 7.85,29.58 7.85,26.61 8.76,25.7 | 7.85,29.58 7.85,32.89 8.51,33.55
S$312
  Top 0.305: 8.26,35.61 5.87,35.61
S$314
  Bottom 0.305: 15.69,39.49 15.77,39.41
S$316  (via drill 0.13)
  other vias: 9.91,37.18
S$317
  Bottom 0.305: 9.91,37.1 14.04,37.1 14.53,37.59 18.33,37.59 18.5,37.43
S$318  (via drill 0.13)
  other vias: 18.5,37.51
S$319
  Top 0.305: 18.67,27.72 18.66,37.26 18.5,37.43
S$320
  Top 0.305: 12.47,11.09 12.47,9.94 15.2,7.21 15.2,6.31
S$321  (via drill 0.13)
  Top 0.305: 14.87,11.26 16.35,11.26 v16.52,11.42
  Bottom 0.305: v16.52,11.42 17.84,11.42 20.23,13.82 20.23,14.86 20.25,14.95
S$322  (via drill 0.13)
  other vias: 20.15,14.83
S$323
  Top 0.305: 40.01,8.29 40.01,5.89 38.77,4.65 28.7,4.65
S$324  (via drill 0.13)  (1 unrouted)
  other vias: 34.23,10.93 27.88,10.93
S$325  (via drill 0.13)
  Top 0.305: v15.86,18.11 13.63,18.11
  Bottom 0.305: v15.86,18.11 15.86,20.26 17.01,21.49 17.01,22.24
S$326  (via drill 0.13)
  other vias: 18.82,23.26
S$327
  Top 0.305: 13.96,19.43 16.6,19.43
S$328
  Top 0.305: 12.8,18.11 12.8,15.63 14.12,14.31 14.7,14.31
S$329
  Top 0.305: 16.52,19.35 16.52,16.46 16.27,16.21 14.78,16.21
S$330
  Top 0.305: 20.15,14.85 20.15,16.71
S$331
  Top 0.305: 16.6,30.25 14.7,30.25
S$332
  Bottom 0.813: 27.71,0.77 34.48,0.77 | 37.04,3.91 37.04,3.33 34.48,0.77 | 34.48,0.77 35.39,0.77 36.79,2.18 36.79,1.52
S$333
  Bottom 0.813: 36.96,3 36.96,6.97
S$334
  Bottom 0.813: 6.25,7.21 12.77,7.21 12.77,7.71 6.5,7.71
S$335
  Top 0.305: 13.63,25.79 13.63,26.12 13.05,26.7 13.05,29.83 | 13.05,29.83 13.05,32.23 13.54,32.72 | 14.53,30.25 13.46,30.25 13.05,29.83
S$336  (via drill 0.13)
  Top 0.305: v15.69,39.41 15.69,37.84
S$337  (via drill 0.13)
  Top 0.305: v45.57,23.97 44.25,23.97
S$338  (via drill 0.13)
  Top 0.305: v46.32,27.11 47.8,27.11
  Bottom 0.305: 45.57,24.05 46.32,24.8 v46.32,27.11 46.32,30.58
S$339  (via drill 0.13)
  other vias: 36.99,40.48
S$340
  Top 0.305: 45.38,4.41 45.38,2.1
S$341  (via drill 0.13)
  Top 0.305: v47.44,4.16 47.44,2.01 47.52,1.93
S$342
  Bottom 0.305: 26.67,53.44 26.67,48.16 30.05,44.77 34.59,44.77 37.07,42.3 37.07,40.4
S$343
  Top 0.305: 37.07,40.48 MCP4.4
S$344
  Top 0.305: 40.13,27.44 40.13,27.11 41.03,26.2 41.03,24.38 | 41.03,24.38 41.03,23.31 | 41.03,23.31 41.03,22.9 40.79,22.65 39.47,22.65 | 36.41,24.71 40.7,24.71 41.03,24.38 | 41.03,23.31 34.92,23.31 34.43,23.81 34.43,25.62 33.19,26.86 33.19,27.19
S$345  (via drill 0.13)
  Top 0.305: v37.73,23.97 39.05,23.97 | v36.74,30.99 38.47,30.99 38.72,31.24
  Bottom 0.305: v37.73,23.97 36.74,24.96 v36.74,30.99
S$346
  Top 0.305: 50.2,35.78 52.34,33.63 52.34,11.42 49.54,8.62
S$347
  Top 0.305: 39.22,39.24 39.71,39.24 40.13,38.83 40.13,34.12 39.3,33.3 38.31,33.3
S$348
  Top 0.305: 35.5,31.98 36.49,31.98 37.07,32.56 37.07,34.37 37.57,34.87 39.55,34.87 40.04,34.37
S$349
  Top 0.305: 50.11,16.62 50.11,16.21 48.88,14.97 46.56,14.97 45.66,15.88 45.66,16.87 | 45.66,16.87 44.83,17.7 | 45.66,16.87 47.06,16.87 47.31,16.62
S$350  (via drill 0.13)
  other vias: 46.32,30.66
S$351
  Top 0.305: 46.32,30.58 44.09,30.58 44.09,30.99
S$353  (via drill 0.13)
  Top 0.305: v35.09,35.61 35.09,33.96 | v50.11,34.21 48.3,34.21 | v45.66,20.17 44.58,20.17 | v44.91,40.48 43.68,40.48
  Bottom 0.305: v35.09,35.61 48.71,35.61 v50.11,34.21 51.6,32.72 | 51.6,7.05 51.6,19.1 | 51.6,19.1 51.6,32.72 | 51.6,32.72 51.6,43.54 | 51.6,43.54 51.6,50.47 | 51.6,50.47 51.1,50.97 48.63,50.97 47.22,52.37 v45.07,52.37 43.76,52.37 42.52,51.13 42.52,47.66 40.7,45.85 37.48,45.85 v37.4,45.93 30.47,45.93 29.15,47.25 v29.15,48.32 | 51.6,50.47 51.6,56.5 48.55,59.55 45.33,59.55 | 45.33,59.55 29.06,59.55 28.9,59.72 | v45.66,20.17 50.53,20.17 51.6,19.1 | 43.59,60.62 44.25,60.62 45.33,59.55 | v44.91,40.48 48.96,44.53 50.61,44.53 51.6,43.54
S$355  (via drill 0.13)
  Top 0.305: v40.13,11.59 40.95,11.59 41.86,10.76
  Bottom 0.305: 27,27.93 26.92,27.93 25.68,26.7 25.68,14.15 28.24,11.59 v40.13,11.59
S$356
  Top 0.305: 44.01,10.6 44.01,10.35
S$357
  Top 0.305: 41.86,10.76 43.51,10.76 44.01,10.27
S$361
  Top 0.305: 37.7,8.53 37.78,8.53
(copper drawn outside any net)
  shapes: Bottom area x101

## Text on the board
tPlace: 100K | A | B | 100K | B | Thresh / In | 100K | 10K | 10K | 100K | Thresh out | A | Env Det / Out | 10K | 10K | 100K | .47uF | 100K | 100K | .47uF | 100K | 100K | 100K | 10K | 22K | 22K | 10K | 10K | 33K | 10K | 10K | 33K | 100 | 100 | 10K | 0.1uF | 0.1uF | 10K | 10K | 10K | 10K | 75K | 20K | 20K | 100pF | 75K | 100pF | 20K | 20K | 7.5K | 7.5K | 10K | 10K | 15K | 15K | 10K | 10K | 10K | 0.1uF | 150K | 150K | 0.1uF | 22uF | 22uF | 10K | 1.8V | + | 10uF | 3.3V | AMP | LED | + | + | IN | 2.2K | 2.2K | 220 | 10uF
bPlace: Preamp / Envelope Detector / Summer / Subtractor / Threshold Detector | GND | GND | AC / out B | Amp / out B | SUM / In B | SUM / out | Amp / out A | SUM / In A | ENV / Det In / A | GND | GND | GND | GND | GND | GND | GND | GND | SUB / out | Amp / out B | SUB / In B | ENV / Det In / B | GND | AC / out A | Amp / out A | SUB / In A | GND | ©2015 / Mauricio de Oliveira / Colin Zyskowski